# Altium PCB 转接板1.PcbDoc
Units mm, origin at the board's own origin, x right, y up, seen from the top; angles counter-clockwise.
Board outline 68.71 x 41.53 mm, 2 copper layers (Top Layer, Bottom Layer); 23 components, 17 nets, 70 pads, 48 vias.
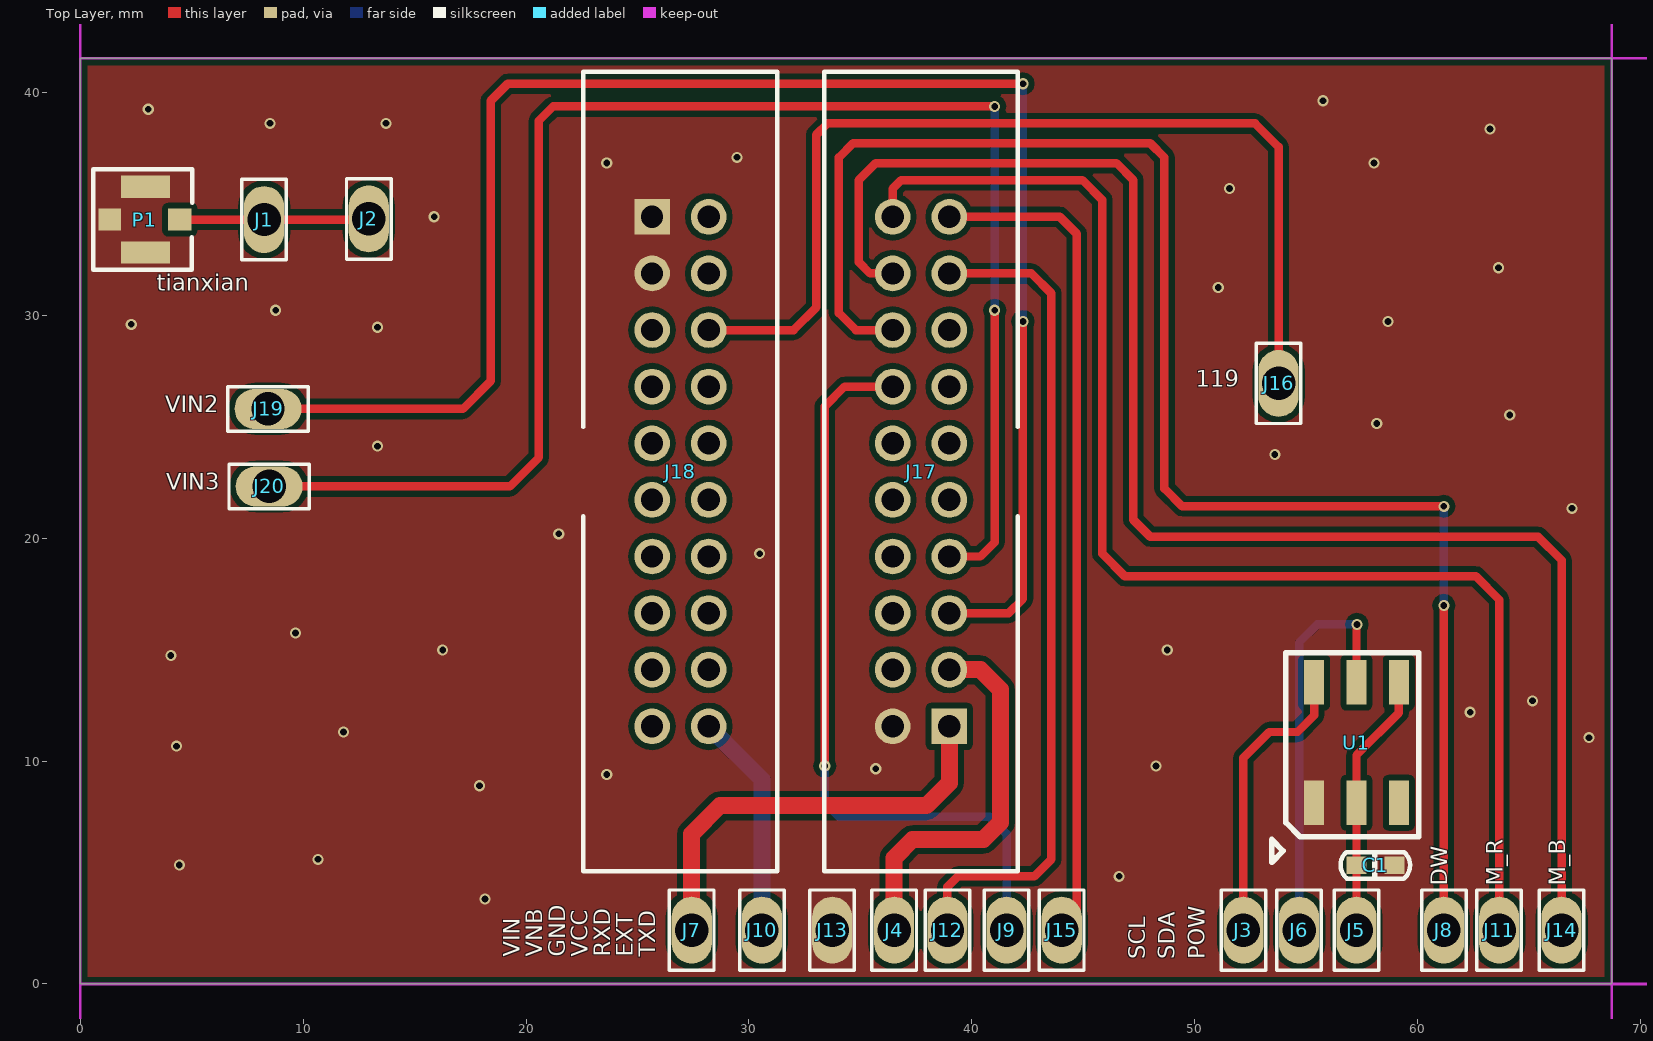
[diagram p0: Top Layer view]
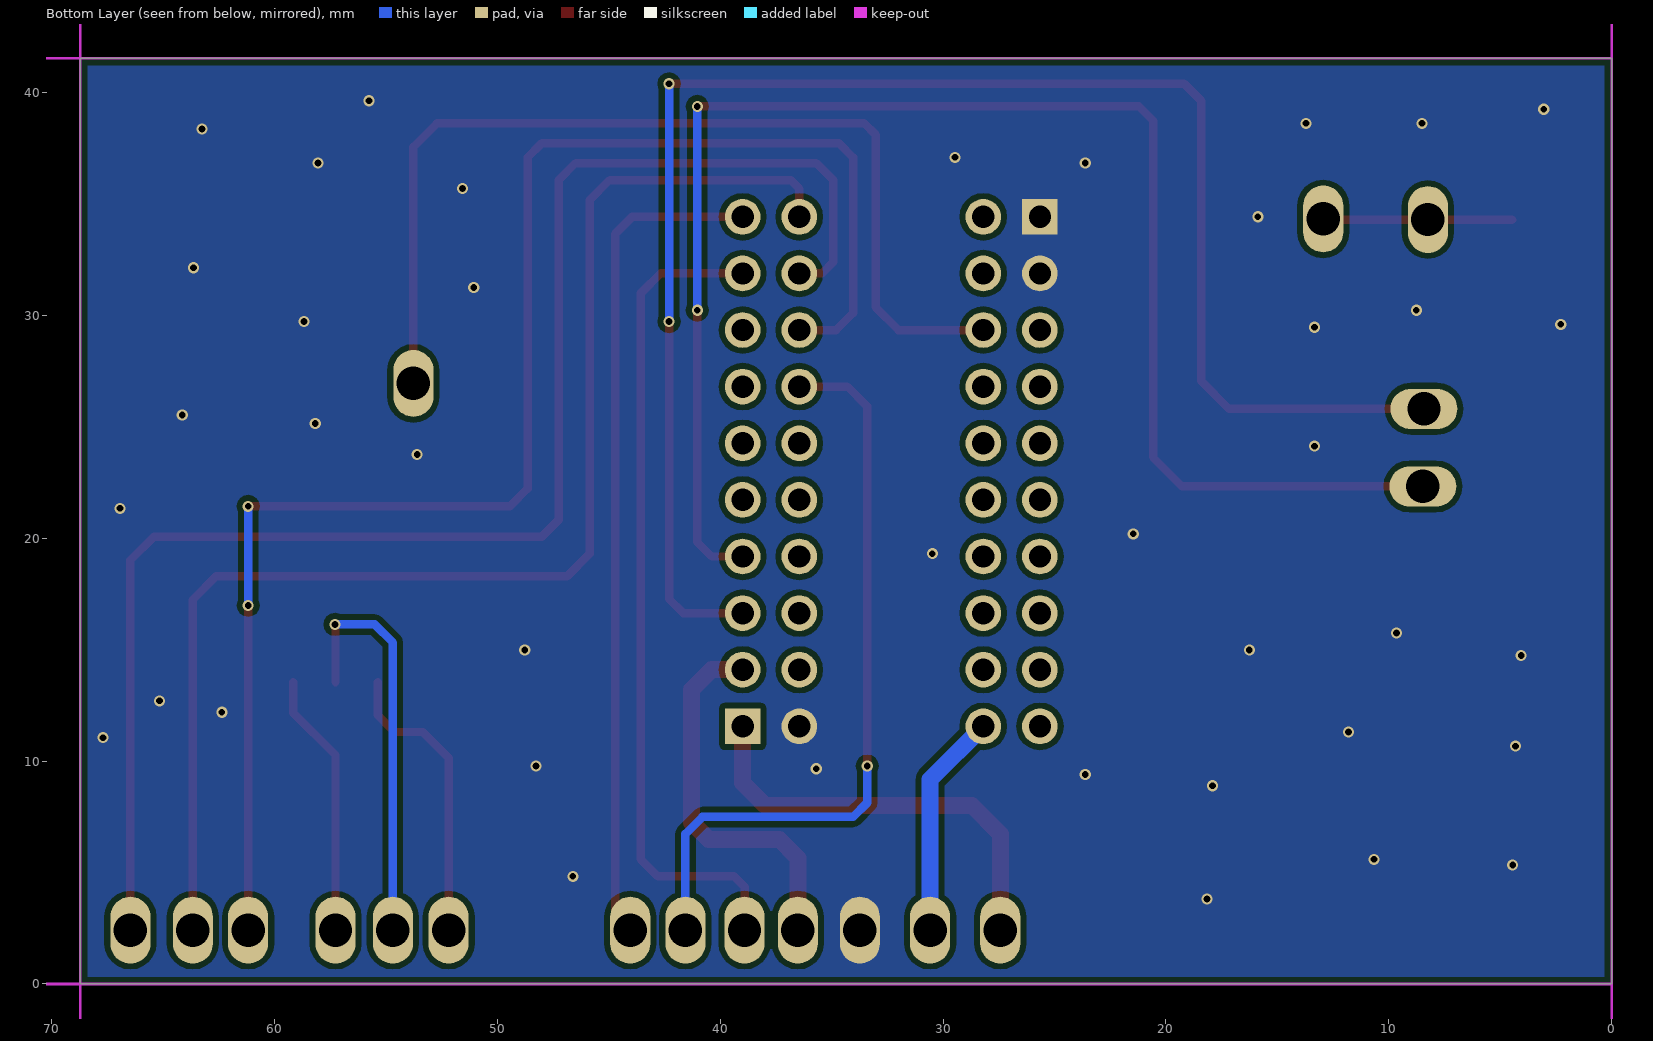
[diagram p1: Bottom Layer view, seen from below]

## Layer stack, top to bottom
Top Solder: solder mask 0.0102, Solder Resist, Dk 3.5
Top Layer: signal copper 0.0356
Dielectric 1: dielectric 0.32, FR-4, Dk 4.8
Bottom Layer: signal copper 0.0356
Bottom Solder: solder mask 0.0102, Solder Resist, Dk 3.5

## Board outline
0,0 68.707,0 68.707,41.529 0,41.529

## Design rules (kind name [scope] priority, off if disabled: settings)
Clearance [All] p1: gap=0.254 ignorepadtopadclearanceinfootprint=FALSE except(0: Arc-Hole Track-Hole SMDPad-Hole THPad-Hole Via-Hole Fill-Hole Poly-Hole Region-Hole Text-Hole)
PlaneConnect [All] p1: planeconnectstyle=Direct reliefexpansion=0.508 reliefentries=4 reliefconductorwidth=0.254 reliefairgap=0.254
PolygonConnect [All] p1: connectstyle=Direct reliefconductorwidth=0.254 reliefentries=4 polygonreliefangle="90 Angle" airgapwidth=0.254
RoutingVias [All] p1: holewidth=0.711 width=1.27 viastyle="Through Hole" minholewidth=0.711 minwidth=1.27 maxholewidth=0.711 maxwidth=1.27
SilkToSilkClearance [All] p1: silktosilkclearance=0
SilkToSolderMaskClearance [IsPad] p1: minsilkscreentomaskgap=0 clearancetoexposedcopper=TRUE
SolderMaskExpansion [All] p1: expansion=0.102
Width [All] p1: maxlimit=0.762 minlimit=0.254 preferedwidth=0.254
27 further rules are at their usual default settings.

## Components (designator, comment, footprint, x,y, rotation, side; value= is the part's Value field where it differs from the comment)
C1 "100N/50V" CAP0603 57.27,5.334 r0 top
J1 "1Pin" 顶针孔1 8.245,34.295 r0 top
J2 "1Pin" 顶针孔1 12.944,34.321 r0 top
J3 "1Pin" 顶针孔1 52.182,2.413 r0 top
J4 "1Pin" 顶针孔1 36.515,2.413 r0 top
J5 "1Pin" 顶针孔1 57.257,2.413 r0 top
J6 "1Pin" 顶针孔1 54.682,2.413 r0 top
J7 "1Pin" 顶针孔1 27.432,2.413 r0 top
J8 "1Pin" 顶针孔1 61.178,2.413 r0 top
J9 "1Pin" 顶针孔1 41.557,2.413 r0 top
J10 "1Pin" 顶针孔1 30.582,2.413 r0 top
J11 "1Pin" 顶针孔1 63.657,2.413 r0 top
J12 "1Pin" 顶针孔1 38.907,2.413 r0 top
J13 "1Pin" 顶针孔1 33.732,2.413 r0 top
J14 "1Pin" 顶针孔1 66.457,2.413 r0 top
J15 "1Pin" 顶针孔1 44.032,2.413 r0 top
J16 "1Pin" 顶针孔1 53.761,26.942 r0 top
J17 "20Pin" "DC254_2*10 - duplicate" 37.719,22.987 r180 top
J18 "20Pin" "DC254_2*10 - duplicate" 26.924,22.987 r0 top
J19 "1Pin" 顶针孔1 8.422,25.799 r90 top
J20 "1Pin" 顶针孔1 8.473,22.319 r90 top
P1 "IPEX" ANT-IPEX 4.471,34.295 r90 top
U1 "HP6862I" HP6862 57.257,10.828 r0 top

## Footprints (in the part's own frame and the unit in brackets; to place one, negate y for a bottom-side part, rotate by r counter-clockwise, add the part's x,y. Pads: shape width x height; smd on the part's side, far side on the other; paste and mask are expansions set on the pad)
ANT-IPEX [mm] "IPX天线座"
  rect 1x1.05 smd: 1(0,0)
  rect 1x2.2 smd: 2(-1.475,1.55) 2(1.475,1.55)
  rect 1x1 smd: 2(0,3.151)
  silkscreen extent -2.26,-0.56 2.26,3.9
CAP0603 [mil]
  rect 35x31 smd: 1(-0.49,0) 2(66.51,0)
  silkscreen extent -29,-24 94,23, body extent 1,-15 72,15, height 20
"DC254_2*10 - duplicate" [mm]
  rect 1.6x1.6 hole 1: 1(-1.27,11.43)
  round 1.6 hole 1: 2(1.27,11.43) 3(-1.27,8.89) 4(1.27,8.89) 5(-1.27,6.35) 6(1.27,6.35) 7(-1.27,3.81) 8(1.27,3.81) 9(-1.27,1.27) 10(1.27,1.27) 11(-1.27,-1.27) 12(1.27,-1.27) 13(-1.27,-3.81) 14(1.27,-3.81) 15(-1.27,-6.35) 16(1.27,-6.35) 17(-1.27,-8.89) 18(1.27,-8.89) 19(-1.27,-11.43) 20(1.27,-11.43)
  silkscreen extent -4.35,-17.93 4.35,17.93
HP6862 [mm]
  rect 0.9x2 smd: 1(-1.9,-2.7) 2(0,-2.7) 3(1.9,-2.7) 4(1.9,2.7) 5(0,2.7) 6(-1.9,2.7)
  silkscreen extent -3.8,-5.37 2.8,4.03
顶针孔1 [mm]
  oval 1.8x3 hole 1.5: 1(0,0)
  silkscreen extent -1,-1.8 1,1.8

## Part data
C1: "100N/50V，±10%，0603", Part Name=0603贴片电容, Part Number=101020103-0021, ID=34
J17 J18: "DC2 2.54mm 2x10pin,2.54mm间距，2x10pin，32×8.55×27.5mm,母头,双排,双排牛角座", Part Name=DC牛角座, Part Number=1010902-0139, ID=4, SMD/DIP=DIP

## Via types
v1: diameter 0.5, hole 0.3, Top Layer to Bottom Layer, tented both sides, 48 vias

## Nets (pads, with @x,y where several pads share a name; then routed paths per layer and width w, separated by ;. In a path a pad name is that pad's centre, name@x,y a point inside that pad or via, vN(x,y) a via of type N, cw(c..) or ccw(c..) an arc to the next point about the centre after c; other vN are vias at no path point)
119: J16.1 J18.6 | length 45
  Top Layer w0.381: J18.6 32.004,29.337 33.02,30.353 33.02,38.1 33.528,38.608 52.705,38.608 53.761,37.552 J16.1
DW: J8.1 J17.16 | length 71.6
  Top Layer w0.381: J17.16 34.798,29.337 34.036,30.099 34.036,37.084 34.671,37.719 48.006,37.719 48.641,37.084 48.641,22.225 49.439,21.427 v1(61.178,21.427) ; J8.1 v1(61.178,16.982)
  Bottom Layer w0.381: v1(61.178,16.982) v1(61.178,21.427)
GND: C1.2 J13.1 J17.2 J18.1 J18.3 P1.2 U1.1
  other v1: 18.161,3.81 46.609,4.826 4.445,5.334 10.668,5.588 17.907,8.89 23.622,9.398 35.687,9.652 48.26,9.779 4.318,10.668 67.691,11.049 11.811,11.303 62.357,12.192 65.151,12.7 4.064,14.732 16.256,14.986 48.768,14.986 9.652,15.748 30.48,19.304 21.463,20.193 66.929,21.336 53.594,23.749 13.335,24.13 58.166,25.146 64.135,25.527 13.335,29.464 2.286,29.591 58.674,29.718 8.763,30.226 51.054,31.242 63.627,32.131 15.875,34.417 51.562,35.687 23.622,36.83 58.039,36.83 29.464,37.084 63.246,38.354 8.509,38.608 13.716,38.608 3.048,39.243 55.753,39.624
HIC_EXT: J9.1 J17.14 | length 34.2
  Top Layer w0.381: v1(33.401,9.779) 33.401,25.908 34.29,26.797 J17.14
  Bottom Layer w0.381: v1(33.401,9.779) 33.401,8.128 34.036,7.493 40.795,7.493 41.557,6.731 J9.1
HIC_RXD: J12.1 J17.17 | length 37.5
  Top Layer w0.381: J12.1 38.907,4.363 39.37,4.826 42.799,4.826 43.561,5.588 43.561,30.988 42.672,31.877 J17.17
HIC_TXD: J15.1 J17.19 | length 37.6
  Top Layer w0.381: J17.19 43.942,34.417 44.704,33.655 44.704,3.085 J15.1
M_B: J14.1 J17.18 | length 70.2
  Top Layer w0.381: J17.18 35.433,31.877 34.925,32.385 34.925,36.068 35.687,36.83 46.482,36.83 47.244,36.068 47.244,20.828 48.006,20.066 65.405,20.066 66.457,19.014 J14.1
M_R: J11.1 J17.20 | length 60.6
  Top Layer w0.381: J17.20 36.449,35.687 36.83,36.068 44.958,36.068 45.847,35.179 45.847,19.304 46.863,18.288 62.611,18.288 63.657,17.242 J11.1
NetC1_1: C1.1 J5.1 U1.2 U1.4 | length 11.9
  Top Layer w0.381: J5.1 C1.1 U1.2 57.257,10.267 59.157,12.167 U1.4
NetJ1_1: J1.1 J2.1 P1.1 | length 8.5
  Top Layer w0.381: P1.1 J1.1 12.918,34.295 J2.1
NetJ3_1: J3.1 U1.6 | length 13.2
  Top Layer w0.381: J3.1 52.182,10.145 53.34,11.303 54.61,11.303 55.357,12.05 U1.6
NetJ6_1: J6.1 U1.5 | length 18.4
  Top Layer w0.381: U1.5 57.257,16.109 v1(57.277,16.129)
  Bottom Layer w0.381: J6.1 54.682,15.312 55.499,16.129 v1(57.277,16.129)
VCC: J4.1 J17.3 | length 17.3
  Top Layer w0.762: J4.1 36.515,5.654 37.338,6.477 40.513,6.477 41.275,7.239 41.275,13.208 40.386,14.097 J17.3
VIN: J7.1 J17.1 | length 19.4
  Top Layer w0.762: J7.1 27.432,6.731 28.702,8.001 37.973,8.001 38.989,9.017 J17.1
VIN2: J17.5 J19.1 | length 74
  Top Layer w0.381: J19.1 17.163,25.799 18.415,27.051 18.415,39.624 19.177,40.386 v1(42.291,40.386) ; J17.5 41.656,16.637 42.291,17.272 v1(42.291,29.718)
  Bottom Layer w0.381: v1(42.291,29.718) v1(42.291,40.386)
VIN3: J17.7 J20.1 | length 70.3
  Top Layer w0.381: J20.1 19.271,22.319 20.574,23.622 20.574,38.735 21.209,39.37 v1(41.021,39.37) ; J17.7 40.386,19.177 41.021,19.812 v1(41.021,30.226)
  Bottom Layer w0.381: v1(41.021,30.226) v1(41.021,39.37)
VNB: J10.1 J18.20 | length 10.1
  Bottom Layer w0.762: J18.20 30.582,9.169 J10.1
pads on no net: J17.4 J17.6 J17.8 J17.9 J17.10 J17.11 J17.12 J17.13 J17.15 J18.2 J18.4 J18.5 J18.7 J18.8 J18.9 J18.10 J18.11 J18.12 J18.13 J18.14 J18.15 J18.16 J18.17 J18.18 J18.19 U1.3

## Polygon pours and split planes (outlines as drawn)
GND on Top Layer "GND" (solid, remove dead copper, pour order 16): 0,41.529 68.707,41.529 68.707,0 0,0
GND on Bottom Layer "GND" (solid, remove dead copper, pour order 18): 0,41.529 68.707,41.529 68.707,0 0,0

## Keep-outs
Keep-Out Layer:
  lines w0.127: 68.707,-3 68.707,0 ; 68.707,86.058 68.707,83.058 ; 0,0 68.707,0 ; 0,0 0,41.529 ; 0,0 0,-3 137.414,-3 137.414,0 ; 0,41.529 68.707,41.529 ; 0,41.529 0,83.058 ; 0,41.529 68.707,41.529 ; 0,83.058 68.707,83.058 ; 0,83.058 0,86.058 137.414,86.058 137.414,83.058 ; 68.707,0 68.707,41.529 ; 68.707,0 68.707,41.529 ; 68.707,0 137.414,0 ; 68.707,41.529 137.414,41.529 ; 68.707,41.529 68.707,83.058 ; 68.707,41.529 137.414,41.529 ; 68.707,83.058 137.414,83.058 ; 137.414,0 137.414,41.529 ; 137.414,41.529 137.414,83.058

## Silkscreen, mask and mechanical layers (free items; w line width, h text height)
Top Overlay:
  text "tianxian" at 3.429,30.861 h1.27
  text "119" at 50.038,26.543 h1.27
  text "VIN2" at 3.81,25.4 h1.27
  text "VIN3" at 3.861,21.92 h1.27
  text "DW" at 61.584,4.405 h1.27 r90
  text "M_R" at 64.063,4.405 h1.27 r90
  text "M_B" at 66.863,4.405 h1.27 r90
  text "VIN" at 19.957,1.23 h1.27 r90
  text "VNB" at 20.973,1.23 h1.27 r90
  text "GND" at 22.003,1.228 h1.27 r90
  text "VCC" at 23.019,1.23 h1.27 r90
  text "RXD" at 24.021,1.228 h1.27 r90
  text "EXT" at 25.037,1.228 h1.27 r90
  text "TXD" at 26.053,1.228 h1.27 r90
  text "SCL" at 48.024,1.103 h1.27 r90
  text "SDA" at 49.357,1.103 h1.27 r90
  text "POW" at 50.691,1.103 h1.27 r90